# EAGLE board uprom2 (EAGLE 9.6.0)
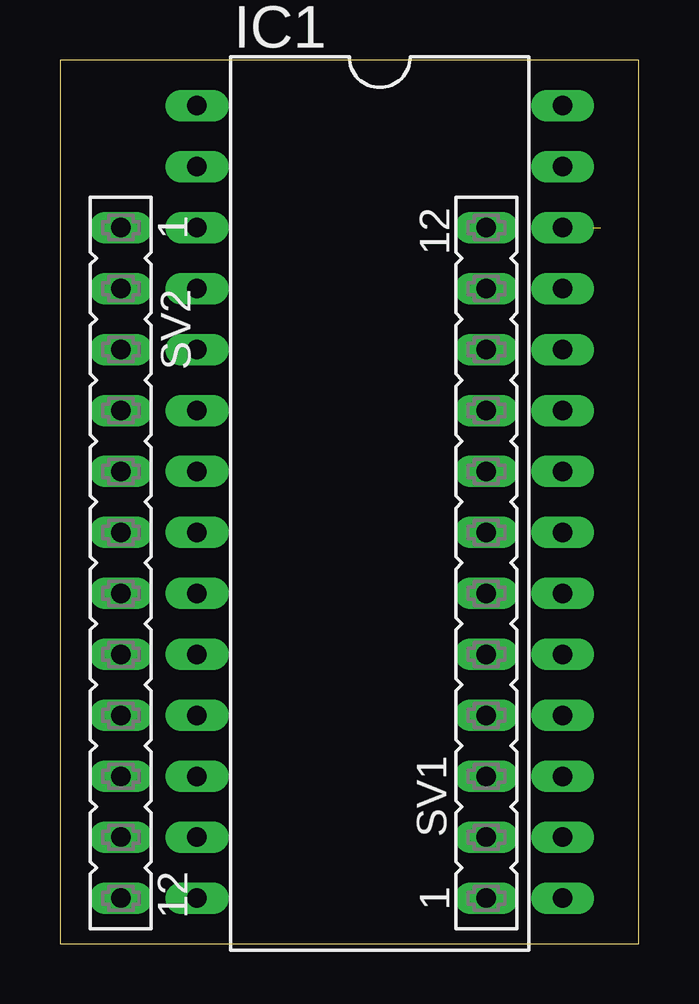
[diagram p0: board, top side]
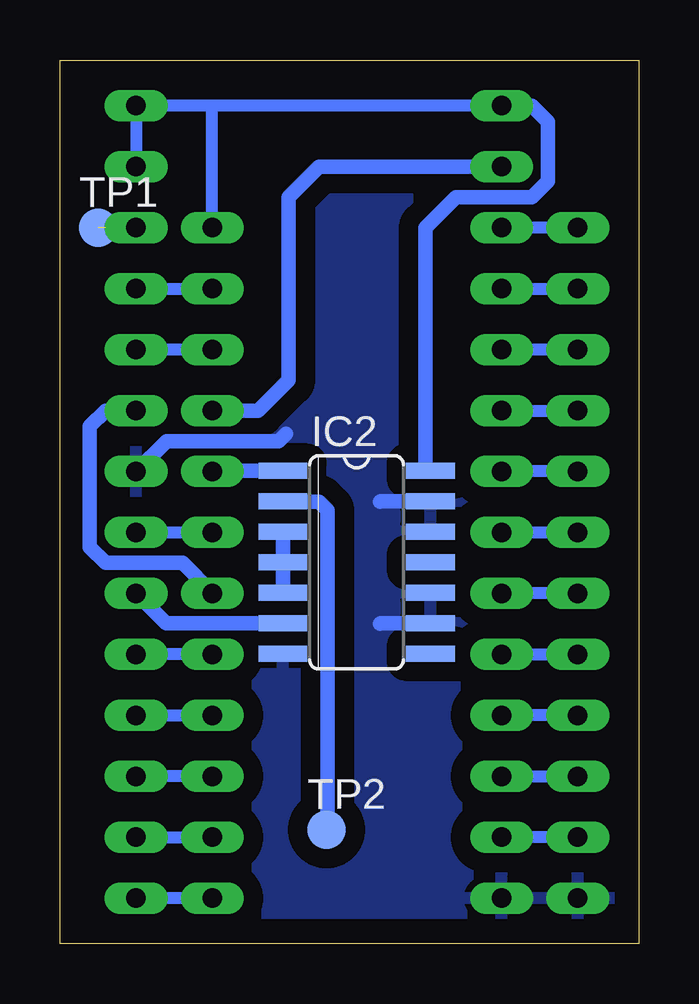
[diagram p1: board, bottom side, seen from below]

Size 24.13 x 36.83 mm. Coordinates in mm from the lower left corner, seen from the top.
Outline: 0,36.83 0,0 24.13,0 24.13,36.83 0,36.83
Copper layers (1*16): Top 0.035mm / dielectric 1.5mm / Bottom 0.035mm
Design rules "default": minimum track width 6mil, minimum drill 0.35mm, track to track 6mil, track to pad 6mil, pad to pad 6mil, via to via 6mil, smd to smd 6mil, copper to edge 40mil, drill to drill 6mil, minimum pad ring 10mil, minimum via ring 8mil, stop-mask expansion 4mil, vias tented up to drill 0mil, thermal gap 10mil

## Footprints (pad centres in the part's own frame; a part is rotated, then mirrored left to right if it is on the bottom)
DIL28-6 = drill 0.813 long: 1 -16.51,-7.62; 2 -13.97,-7.62; 3 -11.43,-7.62; 4 -8.89,-7.62; 5 -6.35,-7.62; 6 -3.81,-7.62; 7 -1.27,-7.62; 8 1.27,-7.62; 9 3.81,-7.62; 10 6.35,-7.62; 11 8.89,-7.62; 12 11.43,-7.62; 13 13.97,-7.62; 14 16.51,-7.62; 15 16.51,7.62; 16 13.97,7.62; 17 11.43,7.62; 18 8.89,7.62; 19 6.35,7.62; 20 3.81,7.62; 21 1.27,7.62; 22 -1.27,7.62; 23 -3.81,7.62; 24 -6.35,7.62; 25 -8.89,7.62; 26 -11.43,7.62; 27 -13.97,7.62; 28 -16.51,7.62
SO14 = smd 0.66 x 2.032: 1 -3.81,-3.073; 2 -2.54,-3.073; 3 -1.27,-3.073; 4 0,-3.073; 5 1.27,-3.073; 6 2.54,-3.073; 7 3.81,-3.073; 8 3.81,3.073; 9 2.54,3.073; 10 1.27,3.073; 11 0,3.073; 12 -1.27,3.073; 13 -2.54,3.073; 14 -3.81,3.073
FE12 = drill 0.813 long: 1 -13.97,0; 2 -11.43,0; 3 -8.89,0; 4 -6.35,0; 5 -3.81,0; 6 -1.27,0; 7 1.27,0; 8 3.81,0; 9 6.35,0; 10 8.89,0; 11 11.43,0; 12 13.97,0
TP16R = smd 1.6 x 1.6: TP 0,0

## Placement (x,y rotation side)
IC1  27C128P  [DIL28-6]  13.34,18.41 270 top
IC2  74AC00D  [SO14]  11.76,15.9 270 bottom
SV1  [FE12]  17.78,15.88 90 top
SV2  [FE12]  2.54,15.88 270 top
TP1  TPSQTP16R  [TP16R]  22.53,29.84 0 bottom
TP2  TPSQTP16R  [TP16R]  13.02,4.76 0 bottom

## Library data of the parts
IC1 = microchip; OC_FARNELL: unknown; OC_NEWARK: unknown
IC2 = 74xx-eu
SV1 SV2 = con-lsta; OC_FARNELL: unknown; OC_NEWARK: unknown
TP1 TP2 = testpad

## Nets
!CS: IC1.20 IC2.6
!SEL_E: IC2.2 TP2.TP
!SEL_F_C: IC2.1 SV1.8
A0: IC1.10 SV2.8
A1: IC1.9 SV2.7
A2: IC1.8 SV2.6
A3: IC1.7 SV2.5
A4: IC1.6 SV2.4
A5: IC1.5 SV2.3
A6: IC1.4 SV2.2
A7: IC1.3 SV2.1
A8: IC1.25 SV1.11
A9: IC1.24 SV1.10
A10: IC1.21 SV1.7
A11: IC1.23 SV1.6
A12: IC1.2 SV1.9
A13: IC1.26 TP1.TP
D0: IC1.11 SV2.9
D1: IC1.12 SV2.10
D2: IC1.13 SV2.11
D3: IC1.15 SV1.1
D4: IC1.16 SV1.2
D5: IC1.17 SV1.3
D6: IC1.18 SV1.4
D7: IC1.19 SV1.5
GND: IC1.14 IC1.22 IC2.7 IC2.9 IC2.10 IC2.12 IC2.13 SV2.12
N$4: IC2.3 IC2.4 IC2.5
VCC: IC1.1 IC1.27 IC1.28 IC2.14 SV1.12

## Tracks (layer width: path | path; a pad name or v marks a point on that pad's centre or on a via)
!CS
  Bottom 0.61: IC2.6 19.71,13.36 IC1.20
!SEL_E
  Bottom 0.61: IC2.2 14.81,18.41 13.34,18.41 12.98,18.06 12.98,4.5 13.02,4.53 TP2.TP
!SEL_F_C
  Bottom 0.61: IC2.1 17.76,19.71 SV1.8
A0
  Bottom 0.508: IC1.10 SV2.8
A1
  Bottom 0.508: SV2.7 IC1.9
A2
  Bottom 0.508: IC1.8 SV2.6
A3
  Bottom 0.508: SV2.5 IC1.7
A4
  Bottom 0.508: IC1.6 SV2.4
A5
  Bottom 0.508: SV2.3 IC1.5
A6
  Bottom 0.508: IC1.4 SV2.2
A7
  Bottom 0.508: SV2.1 IC1.3
A8
  Bottom 0.508: IC1.25 SV1.11
A9
  Bottom 0.508: SV1.10 IC1.24
A10
  Bottom 0.508: IC1.21 SV1.7
A11
  Bottom 0.61: IC1.23 22.23,22.23 22.89,21.57 22.89,16.54 22.23,15.88 19.03,15.88 17.78,14.63 SV1.6
A12
  Bottom 0.61: IC1.2 13.34,32.38 14.61,31.12 14.61,23.5 15.88,22.23 SV1.9
A13  (1 unrouted)
  Bottom 0.508: IC1.26 22.23,29.84
D0
  Bottom 0.508: SV2.9 IC1.11
D1
  Bottom 0.508: IC1.12 SV2.10
D2
  Bottom 0.508: SV2.11 IC1.13
D3
  Bottom 0.508: SV1.1 IC1.15
D4
  Bottom 0.508: IC1.16 SV1.2
D5
  Bottom 0.508: SV1.3 IC1.17
D6
  Bottom 0.508: IC1.18 SV1.4
D7
  Bottom 0.508: SV1.5 IC1.19
GND
  Bottom 0.61: IC1.22 19.69,20.96 15.01,20.96 14.71,21.26 | IC2.13 10.77,18.44 10.8,18.41 | IC2.9 10.77,13.36 10.8,13.34
  pour Bottom (isolate 0.813): 0.15,36.83 24.13,36.83 24.13,0 0.15,0
N$4
  Bottom 0.61: IC2.5 IC2.4 IC2.3
VCC
  Bottom 0.508: IC1.27 IC1.28 17.78,34.93 | IC1.1 17.78,34.93 | SV1.12 17.78,34.93
  Bottom 0.61: IC1.1 4.45,34.93 3.79,34.27 3.79,31.77 4.45,31.12 7.62,31.12 8.89,29.84 8.89,19.69 8.71,19.69 IC2.14